# Altium PCB CareLite 1.21.pcbdoc (part 3 of 3)
Units mil, origin at the board's own origin, x right, y up, seen from the top; angles counter-clockwise.
Board outline 3463.4 x 4229.5 mil, 2 copper layers (Top Layer, Bottom Layer); 41 components, 60 nets, 161 pads, 146 vias.
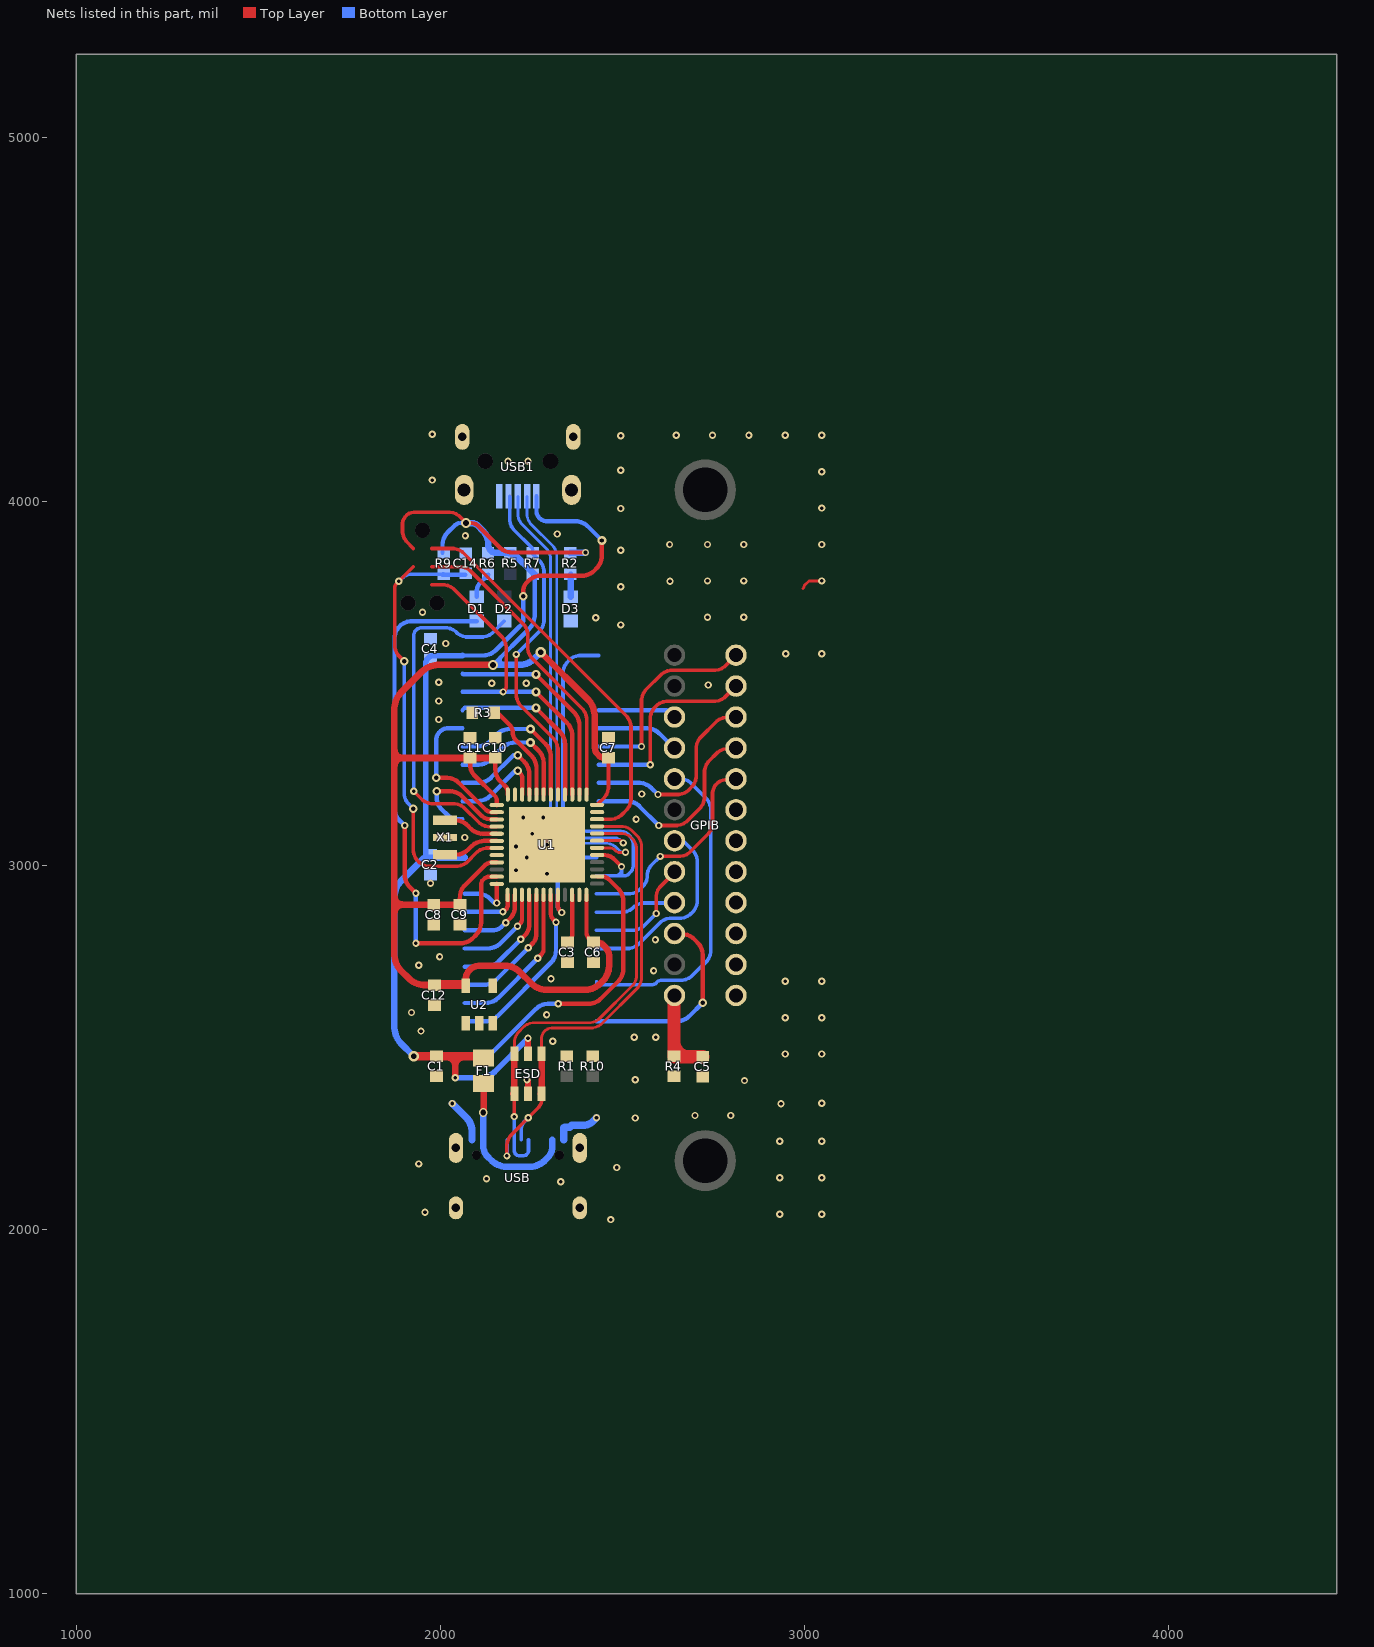
[diagram p3: the nets of this part, all layers, seen from the top]

## Via types
v1: diameter 20, hole 10, Top Layer to Bottom Layer, tented both sides, 127 vias
v2: diameter 24, hole 12, Top Layer to Bottom Layer, tented both sides, 14 vias
v3: diameter 28, hole 16, Top Layer to Bottom Layer, tented both sides, 4 vias
v4: diameter 24, hole 16, Top Layer to Bottom Layer, tented both sides, 1 vias

## Nets (pads, with @x,y where several pads share a name; then routed paths per layer and width w, separated by ;. In a path a pad name is that pad's centre, name@x,y a point inside that pad or via, vN(x,y) a via of type N, cw(c..) or ccw(c..) an arc to the next point about the centre after c; other vN are vias at no path point) (continued)
DIO3: GPIB.3 | length 242.8
  Bottom Layer w12: 2435.02,3427.75 2622.52,3427.75 GPIB.3@2643.52,3406.75 ; 2609.04,3427.75 cw(c2609.03,3395.19) GPIB.3@2632.06,3418.21
DIO4: GPIB.4 | length 229.5
  Bottom Layer w12: 2435.02,3377.75 2568.87,3377.75 2573.86,3377.26 2578.79,3376.28 2583.59,3374.82 2588.23,3372.9 2592.66,3370.53 2596.83,3367.74 2600.71,3364.56 GPIB.4@2643.52,3321.75
DIO5: GPIB.13 | length 560.2
  Top Layer w10: v1(2553.02,3327.75) 2553.02,3457.09 2554.81,3466.06 2558.31,3474.51 2563.39,3482.12 2607.65,3526.38 2615.26,3531.46 2623.71,3534.97 2632.68,3536.75 2755.86,3536.75 2764.83,3538.53 2773.28,3542.04 2780.89,3547.12 GPIB.13@2812.52,3578.75
  Bottom Layer w12: 2435.02,3327.75 v1(2553.02,3327.75)
DIO6: GPIB.14 | length 546.3
  Top Layer w10: v1(2577.02,3277.75) 2577.02,3408.09 2578.8,3417.06 2582.31,3425.51 2587.39,3433.12 2595.65,3441.38 2603.26,3446.46 2611.71,3449.97 2620.68,3451.75 2755.86,3451.75 2764.83,3453.53 2773.28,3457.04 2780.89,3462.12 GPIB.14@2812.52,3493.75
  Bottom Layer w12: 2435.02,3277.75 v1(2577.02,3277.75)
DIO7: GPIB.15 | length 534.9
  Top Layer w10: v1(2598.02,3195.75) 2655.36,3195.75 2664.33,3197.54 2672.78,3201.04 2680.39,3206.12 2692.65,3218.38 2697.74,3225.99 2701.24,3234.44 2703.02,3243.42 2703.02,3326.09 2704.81,3335.06 2708.31,3343.51 2713.39,3351.12 2759.65,3397.38 2767.26,3402.47 2775.71,3405.97 2784.69,3407.75 2811.52,3407.75 GPIB.15@2812.52,3406.75
  Bottom Layer w12: 2435.02,3227.75 2547.37,3227.75 2552.36,3227.26 2557.29,3226.28 2562.09,3224.82 2566.73,3222.9 2571.16,3220.53 2575.33,3217.74 2579.21,3214.56 v1(2598.02,3195.75)
DIO8: GPIB.16 | length 544.5
  Top Layer w10: v1(2600.02,3110.75) 2651.36,3110.75 2660.33,3112.54 2668.78,3116.04 2676.39,3121.12 2715.65,3160.38 2720.73,3167.99 2724.23,3176.44 2726.02,3185.41 2726.02,3261.09 2727.8,3270.06 2731.3,3278.51 2736.39,3286.12 2761.65,3311.38 2769.26,3316.46 2777.71,3319.97 2786.68,3321.75 GPIB.16@2812.52,3321.75
  Bottom Layer w12: 2435.02,3177.75 2514.37,3177.75 2519.36,3177.26 2524.29,3176.28 2529.09,3174.82 2533.73,3172.9 2538.16,3170.53 2542.33,3167.74 2546.21,3164.56 v1(2600.02,3110.75)
DS18B20: R7.2 U1.41 USB1.4 | length 950.2
  Top Layer w10: v1(2209.02,3580.75) 2209.02,3466.41 2210.8,3457.44 2214.31,3448.99 2219.39,3441.38 2312.85,3347.92 2317.93,3340.31 2321.43,3331.86 2323.22,3322.89 U1.41@2323.22,3195.55
  Bottom Layer w10: USB1.4@2190.42,4015.05 2190.42,3949.81 2192.2,3940.84 2195.71,3932.39 2200.79,3924.78 2251.98,3873.59 R7.2@2254.02,3868.66 ; v1(2209.02,3580.75) 2274.65,3646.38 2279.73,3653.99 2283.24,3662.44 2285.02,3671.41 2285.02,3811.09 2283.24,3820.06 2279.73,3828.51 2274.65,3836.12 2254.02,3856.75 R7.2@2254.02,3860.41 R7.2@2254.02,3868.66 ; R7.2@2262.45,3848.33 cw(c2282.79,3868.67) R7.2@2254.02,3868.67
EOI: GPIB.5 | length 898.9
  Bottom Layer w8: 2429.12,2672.75 2429.12,2682.75 ; GPIB.5@2643.52,3236.75 GPIB.5@2644.52,3237.75
  Bottom Layer w10: 2429.12,2672.75 2583.24,2672.75 2591.4,2676.13 2597.64,2682.37 2605.8,2685.75 2665.36,2685.75 2674.33,2687.53 2682.78,2691.04 2690.39,2696.12 2732.65,2738.38 2737.73,2745.99 2741.24,2754.44 2743.02,2763.41 2743.02,3158.09 2741.24,3167.06 2737.73,3175.51 2732.65,3183.12 2687.05,3228.72 2680.43,3233.15 2673.07,3236.2 2665.25,3237.75 2644.52,3237.75 GPIB.5@2643.52,3238.75
F1_1: F1.1 | length 439.1
  Top Layer w18: v4(2118.02,2321.75) 2119.02,2322.75 F1.1@2119.02,2401.75
  Bottom Layer w18: v4(2118.02,2321.75) 2118.52,2321.25 2118.52,2247.35 2118.52,2225.63 2120.15,2217.44 2123.34,2209.73 2127.98,2202.79 2141.23,2189.54 2146.17,2185.48 2151.48,2181.93 2157.12,2178.92 2163.02,2176.48 2169.14,2174.62 2175.4,2173.38 2181.76,2172.75 2246.65,2172.75 2252.91,2173.37 2259.08,2174.59 2265.1,2176.42 2270.91,2178.83 2276.45,2181.79 2281.68,2185.29 2286.55,2189.28 2297.52,2200.25 2302.42,2207.59 2305.8,2215.74 2307.52,2224.39 2307.52,2247.35
GND: C1.1 C2.2 C3.1 C4.2 C5.1 C6.1 C7.1 C8.1 C9.1 C10.1 C11.1 C12.1 C14.1 D3.2 ESD.2 GPIB.18 GPIB.19 GPIB.20 GPIB.21 GPIB.22 GPIB.23 GPIB.24 R1.2 R3.2 R4.2 R10.2 U1.8 U1.23 U1.35 U1.47 U1.49 U2.2 U2.4 USB1.5 USB1.6 USB1.7 USB1.8 USB1.9 USB.A1B12 X1.2 | length 353.2
  Top Layer w8: 2997.02,3761.75 2999.02,3766.75 3001.02,3770.75 3013.02,3782.75 v1(3048.02,3782.75)
  Top Layer w16: v1(2238.02,2411.75) 2241.02,2408.75 ESD.2@2241.02,2373.63
  Bottom Layer w20: v1(2033.02,2346.75) 2072.87,2306.9 2076.29,2302.74 2079.28,2298.26 2081.82,2293.51 2083.88,2288.53 2085.44,2283.38 2086.49,2278.1 2087.02,2272.74 2087.02,2247.35 ; 2339.02,2247.35 2339.02,2279.75 2341.02,2281.75 2356.02,2281.75 2361.02,2286.75 2396.7,2286.75 2403.63,2288.13 2410.15,2290.83 2416.02,2294.75 v1(2429.02,2307.75)
  other v1: 2468.02,2027.75 2933.02,2042.75 3048.02,2042.75 1958.02,2047.75 2331.02,2131.75 2127.02,2139.75 2933.02,2142.75 3048.02,2142.75 2485.02,2170.75 1941.02,2180.75 2933.02,2242.75 3048.02,2242.75 2536.02,2306.75 2700.02,2313.75 2798.02,2313.75 2936.02,2345.75 3048.02,2347.75 2836.02,2409.75 2536.02,2411.75 2948.02,2482.75 3048.02,2482.75 2309.02,2517.75 2533.02,2528.75 2592.02,2528.75 1947.02,2545.75 2948.02,2582.75 3048.02,2582.75 2292.02,2590.75 1921.02,2596.75 2948.02,2682.75 3048.02,2682.75 2304.02,2689.75 2586.02,2711.75 1941.02,2726.75 1998.02,2749.75 2591.02,2796.75 1973.02,2951.75 2293.02,2977.75 2208.02,2987.75 2238.02,3022.75 2208.02,3052.75 2293.03,3057.75 2067.02,3077.75 2253.02,3087.75 2538.02,3127.75 2228.02,3132.75 2228.02,3132.75 2283.02,3132.75 2553.54,3197.07 1996.02,3401.75 1996.05,3452.76 2736.02,3496.75 2141.02,3501.75 2236.02,3501.75 1996.05,3503.87 2949.02,3582.75 3048.02,3582.75 2015.02,3610.75 2496.02,3661.75 2427.02,3681.75 2734.02,3682.75 2834.02,3682.75 1951.02,3696.75 2496.02,3766.75 2631.02,3781.75 2734.02,3782.75 2834.02,3782.75 2496.02,3866.75 2630.02,3882.75 2734.02,3882.75 2834.02,3882.75 3048.02,3882.75 2069.02,3906.75 2321.02,3911.75 2496.02,3981.75 3048.02,3982.75 1978.02,4059.75 3048.02,4082.75 2496.02,4086.75 2186.02,4111.75 2241.02,4111.75 2496.02,4181.75 2648.02,4182.75 2748.02,4182.75 2848.02,4182.75 2948.02,4182.75 3048.02,4182.75 1978.02,4185.75
GPIB_12: C5.2 GPIB.12 R4.1 | length 311.8
  Top Layer w36: 2642.02,2516.35 ccw(c2683.02,2516.35) 2683.02,2475.35 ; GPIB.12@2643.52,2643.75 2642.02,2642.25 2642.02,2476.35 2643.02,2475.35 C5.2@2721.02,2475.35
IFC: GPIB.9 | length 221.7
  Bottom Layer w10: 2429.12,2872.75 2504.55,2872.75 2512.79,2874.39 2520.56,2877.61 2527.55,2882.28 2533.49,2888.22 2540.48,2892.89 2548.25,2896.11 2556.49,2897.75 2642.52,2897.75 GPIB.9@2643.52,2896.75
IO_ATN: U1.18 | length 429.4
  Top Layer w12: v1(2268.02,2745.75) 2277.61,2755.34 2280.51,2759.68 2282.5,2764.49 2283.52,2769.6 U1.18@2283.53,2919.96
  Bottom Layer w12: 2066.92,2622.75 2126.37,2622.75 2131.36,2623.24 2136.29,2624.22 2141.09,2625.68 2145.73,2627.6 2150.16,2629.97 2154.33,2632.76 2158.21,2635.94 v1(2268.02,2745.75)
IO_DAV: U1.16 | length 313.2
  Top Layer w12: v1(2221.02,2797.75) 2235.32,2812.05 2239.63,2818.51 2242.61,2825.68 2244.12,2833.3 U1.16@2244.12,2919.96
  Bottom Layer w12: 2066.92,2722.75 2127.37,2722.75 2132.36,2723.24 2137.29,2724.22 2142.09,2725.68 2146.73,2727.6 2151.16,2729.97 2155.33,2732.76 2159.21,2735.94 v1(2221.02,2797.75)
IO_DC: U1.26 | length 834.8
  Top Layer w12: v1(2324.02,2620.75) 2408.37,2620.75 2413.36,2621.24 2418.29,2622.22 2423.09,2623.68 2427.73,2625.6 2432.16,2627.97 2436.33,2630.76 2440.21,2633.94 2489.83,2683.56 2493.01,2687.44 2495.8,2691.61 2498.17,2696.04 2500.09,2700.68 2501.55,2705.48 2502.53,2710.41 2503.02,2715.4 2503.02,2904.1 2502.53,2909.09 2501.55,2914.02 2500.09,2918.82 2498.17,2923.46 2495.8,2927.89 2493.01,2932.06 2489.83,2935.94 2461.92,2963.85 2457.08,2967.08 2451.7,2969.31 2445.98,2970.45 U1.26@2430.82,2970.45
  Bottom Layer w12: 2066.92,2472.75 2110.37,2472.75 2115.36,2473.24 2120.29,2474.22 2125.09,2475.68 2129.73,2477.6 2134.16,2479.97 2138.33,2482.76 2142.21,2485.94 2263.83,2607.56 2267.71,2610.74 2271.89,2613.53 2276.31,2615.9 2280.95,2617.82 2285.75,2619.28 2290.68,2620.26 2295.67,2620.75 v1(2324.02,2620.75)
IO_DIO1: U1.38 | length 580.3
  Top Layer w12: v2(2263.02,3525.75) 2369.13,3419.64 2372.32,3415.76 2375.1,3411.59 2377.47,3407.16 2379.39,3402.52 2380.85,3397.72 2381.83,3392.79 2382.32,3387.8 U1.38@2382.32,3195.55
  Bottom Layer w12: 2061.02,3527.75 2063.02,3525.75 v2(2263.02,3525.75)
IO_DIO2: U1.39 | length 930.7
  Top Layer w10: 1976.02,3771.75 2011.36,3771.75 2020.33,3769.97 2028.78,3766.46 2036.39,3761.38 2170.65,3627.12 2175.73,3619.51 2179.24,3611.06 2181.02,3602.09 2181.02,3489.96 2178.82,3484.42 v1(2172.51,3477.75)
  Top Layer w12: v2(2263.02,3477.75) 2349.43,3391.34 2352.61,3387.46 2355.4,3383.28 2357.77,3378.86 2359.69,3374.22 2361.15,3369.42 2362.13,3364.49 2362.62,3359.5 U1.39@2362.62,3195.55
  Bottom Layer w12: 2061.02,3477.75 v1(2172.51,3477.75) v2(2263.02,3477.75)
IO_DIO3: U1.40 | length 473.6
  Top Layer w12: v2(2263.02,3433.75) 2329.73,3367.04 2332.91,3363.16 2335.7,3358.99 2338.07,3354.56 2339.99,3349.92 2341.45,3345.12 2342.43,3340.19 2342.92,3335.2 U1.40@2342.93,3195.55
  Bottom Layer w12: 2061.02,3427.75 2067.02,3433.75 v2(2263.02,3433.75)
IO_DIO4: U1.2 | length 396.4
  Top Layer w12: v2(1989.02,3241.75) 2018.37,3241.75 2023.36,3241.26 2028.29,3240.28 2033.09,3238.82 2037.73,3236.9 2042.15,3234.53 2046.33,3231.74 2050.21,3228.56 2125.39,3153.38 2130.03,3150.28 2135.2,3148.14 2140.68,3147.05 U1.2@2155.22,3147.05
  Bottom Layer w12: v2(1989.02,3241.75) 1989.02,3348.51 1990.27,3354.78 1992.71,3360.68 1996.26,3365.99 2000.78,3370.51 2006.09,3374.06 2011.99,3376.5 2018.26,3377.75 2061.02,3377.75
IO_DIO5: U1.42 | length 403.6
  Top Layer w12: v2(2248.02,3375.75) 2290.33,3333.44 2293.51,3329.56 2296.3,3325.39 2298.67,3320.96 2300.59,3316.32 2302.05,3311.52 2303.03,3306.59 2303.52,3301.6 U1.42@2303.53,3195.55
  Bottom Layer w12: 2061.02,3327.75 2103.37,3327.75 2108.36,3328.24 2113.29,3329.22 2118.09,3330.68 2122.73,3332.6 2127.16,3334.97 2131.33,3337.76 2135.21,3340.94 2156.83,3362.56 2160.71,3365.74 2164.89,3368.53 2169.31,3370.9 2173.95,3372.82 2178.75,3374.28 2183.68,3375.26 2188.67,3375.75 v2(2248.02,3375.75)
IO_DIO6: U1.43 | length 363.8
  Top Layer w12: v2(2248.02,3338.75) 2270.73,3316.04 2273.91,3312.16 2276.7,3307.99 2279.07,3303.56 2280.99,3298.92 2282.45,3294.12 2283.43,3289.19 2283.92,3284.2 U1.43@2283.93,3195.55
  Bottom Layer w12: 2061.02,3277.75 2105.37,3277.75 2110.36,3278.24 2115.29,3279.22 2120.09,3280.68 2124.73,3282.6 2129.16,3284.97 2133.33,3287.76 2137.21,3290.94 2171.83,3325.56 2175.71,3328.74 2179.89,3331.53 2184.31,3333.9 2188.95,3335.82 2193.75,3337.28 2198.68,3338.26 2203.67,3338.75 v2(2248.02,3338.75)
IO_DIO7: U1.45 | length 300.4
  Top Layer w12: v2(2213.02,3303.75) 2231.33,3285.44 2234.51,3281.56 2237.3,3277.39 2239.67,3272.96 2241.59,3268.32 2243.05,3263.52 2244.03,3258.59 2244.52,3253.6 U1.45@2244.53,3195.55
  Bottom Layer w12: 2061.02,3227.75 2106.37,3227.75 2111.36,3228.24 2116.29,3229.22 2121.09,3230.68 2125.73,3232.6 2130.16,3234.97 2134.33,3237.76 2138.21,3240.94 2201.02,3303.75 v2(2213.02,3303.75)
IO_DIO8: U1.46 | length 253.6
  Top Layer w12: v2(2213.02,3260.75) 2221.75,3252.02 2224.82,3244.61 U1.46@2224.82,3195.55
  Bottom Layer w12: 2061.02,3177.75 2104.37,3177.75 2109.36,3178.24 2114.29,3179.22 2119.09,3180.68 2123.73,3182.6 2128.16,3184.97 2132.33,3187.76 2136.21,3190.94 2206.02,3260.75 v2(2213.02,3260.75)
IO_EOI: U1.17 | length 367.9
  Top Layer w12: v1(2242.02,2774.75) 2255.51,2788.24 2259.59,2794.34 2262.39,2801.11 2263.82,2808.3 U1.17@2263.82,2919.96
  Bottom Layer w12: 2066.92,2672.75 2121.37,2672.75 2126.36,2673.24 2131.29,2674.22 2136.09,2675.68 2140.73,2677.6 2145.16,2679.97 2149.33,2682.76 2153.21,2685.94 v1(2242.02,2774.75)
IO_IFC: U1.13 | length 157.7
  Top Layer w12: v1(2172.02,2873.75) 2174.02,2873.75 2182.16,2881.89 2185.02,2888.79 U1.13@2185.03,2919.96
  Bottom Layer w12: 2066.92,2872.75 2067.92,2873.75 v1(2172.02,2873.75)
IO_NDAC: U1.14 | length 205.1
  Top Layer w12: v1(2180.02,2843.75) 2195.31,2859.04 2199.92,2865.94 2203.1,2873.62 2204.72,2881.76 U1.14@2204.72,2919.96
  Bottom Layer w12: 2066.92,2822.75 2147.7,2822.75 2154.63,2824.13 2161.15,2826.83 2167.02,2830.75 v1(2180.02,2843.75)
IO_NRFD: U1.15 | length 258.8
  Top Layer w12: v1(2212.02,2833.75) 2221.2,2842.93 2224.42,2850.71 U1.15@2224.43,2919.96
  Bottom Layer w12: 2066.92,2772.75 2132.37,2772.75 2137.36,2773.24 2142.29,2774.22 2147.09,2775.68 2151.73,2777.6 2156.16,2779.97 2160.33,2782.76 2164.21,2785.94 v1(2212.02,2833.75)
IO_PE: U1.3 | length 314.3
  Top Layer w12: v2(1990.02,3204.75) 2027.37,3204.75 2032.36,3204.26 2037.29,3203.28 2042.09,3201.82 2046.73,3199.9 2051.16,3197.53 2055.33,3194.74 2059.21,3191.56 2114.85,3135.92 2121.14,3131.72 2128.12,3128.82 2135.54,3127.35 U1.3@2155.23,3127.36
  Bottom Layer w12: v2(1990.02,3204.75) 1990.02,3182.47 1991.69,3174.07 1994.97,3166.17 1999.72,3159.05 2022.93,3135.84 2028.87,3131.87 2035.46,3129.14 2042.45,3127.75 2061.02,3127.75
IO_REN: U1.12 | length 149.1
  Top Layer w12: v1(2155.02,2897.75) U1.12@2155.23,2950.16
  Bottom Layer w12: 2066.92,2922.75 2109.55,2922.75 2117.79,2921.11 2125.56,2917.89 2132.55,2913.22 2148.02,2897.75 v1(2155.02,2897.75)
IO_SC: U1.20 | length 283.7
  Top Layer w12: U1.20@2322.82,2919.96 2322.82,2887.07 2325.73,2880.04 v1(2334.02,2871.75)
  Bottom Layer w12: v1(2334.02,2871.75) 2325.88,2879.89 2323.02,2886.79 2323.02,2961.1 2323.51,2966.09 2324.49,2971.02 2325.95,2975.82 2327.87,2980.46 2330.24,2984.89 2333.03,2989.06 2336.21,2992.94 2352.83,3009.56 2356.71,3012.74 2360.89,3015.53 2365.31,3017.9 2369.95,3019.82 2374.75,3021.28 2379.68,3022.26 2384.67,3022.75 2429.12,3022.75
IO_SRQ: U1.19 | length 496.6
  Top Layer w12: U1.19@2303.12,2919.96 2303.12,2867.68 2304.1,2862.77 2306.01,2858.14 2308.8,2853.97 v1(2318.02,2844.75)
  Bottom Layer w12: 2066.92,2572.75 2124.37,2572.75 2129.36,2573.24 2134.29,2574.22 2139.09,2575.68 2143.73,2577.6 2148.16,2579.97 2152.33,2582.76 2156.21,2585.94 2304.83,2734.56 2308.01,2738.44 2310.8,2742.61 2313.17,2747.04 2315.09,2751.68 2316.55,2756.48 2317.53,2761.41 2318.02,2766.4 v1(2318.02,2844.75)
IO_TE: U1.29 | length 1042.6
  Top Layer w12: U1.29@2430.82,3029.56 2452.73,3029.55 2460.98,3027.91 2468.76,3024.69 2475.76,3020.01 v1(2498.02,2997.75)
  Bottom Layer w10: 2429.12,2972.75 2498.02,2972.75 ; 2435.02,3577.75 2381.68,3577.75 2372.71,3575.97 2364.26,3572.46 2356.65,3567.38 2347.39,3558.12 2342.31,3550.51 2338.8,3542.06 2337.02,3533.09 2337.02,3158.41 2338.8,3149.44 2342.31,3140.99 2347.39,3133.38 2375.65,3105.12 2383.26,3100.04 2391.71,3096.53 2400.68,3094.75 2496.16,3094.75 2503.42,3093.31 2510.25,3090.48 2516.4,3086.37 2521.64,3081.13 2525.75,3074.98 2528.58,3068.15 2530.02,3060.89 2530.02,2998.91 2528.91,2993.31 2526.72,2988.02 2523.54,2983.27 2515.78,2975.51 2509.12,2972.75 2498.02,2972.75 ; 2483.02,2972.75 ccw(c2483.02,2987.75) 2498.02,2987.75 ; v1(2498.02,2997.75) 2498.02,2972.75
LED1: D1.2 U1.11 | length 1480.7
  Top Layer w12: v1(1902.02,3110.75) 1902.02,2974.4 1902.51,2969.41 1903.49,2964.49 1904.95,2959.68 1906.87,2955.04 1909.24,2950.62 1912.03,2946.44 1915.21,2942.56 v1(1933.02,2924.75) ; v1(1933.02,2786.75) 2056.37,2786.75 2061.36,2787.24 2066.29,2788.22 2071.09,2789.68 2075.73,2791.6 2080.16,2793.97 2084.33,2796.76 2088.21,2799.94 2098.83,2810.56 2102.01,2814.44 2104.8,2818.61 2107.17,2823.04 2109.09,2827.68 2110.55,2832.48 2111.53,2837.41 2112.02,2842.4 2112.02,2950.57 2115.68,2959.41 2122.46,2966.19 2131.3,2969.85 U1.11@2155.22,2969.85
  Bottom Layer w12: v1(1902.02,3110.75) 1884.69,3128.08 1879.46,3135.91 1875.86,3144.61 1874.02,3153.84 1874.02,3628.39 1875.89,3637.79 1879.56,3646.64 1884.88,3654.61 1891.66,3661.39 1899.63,3666.71 1908.48,3670.38 1917.88,3672.25 D1.2@2100.02,3672.25 ; v1(1933.02,2786.75) v1(1933.02,2924.75)
LED2: D2.2 U1.4 | length 974.8
  Top Layer w10: v1(1927.02,3204.75) 1950.65,3181.12 1958.26,3176.04 1966.71,3172.53 1975.68,3170.75 2039.36,3170.75 2048.33,3168.97 2056.78,3165.46 2064.39,3160.38 2106.85,3117.92 2114.39,3112.88 2122.76,3109.42 2131.64,3107.65 U1.4@2155.22,3107.65
  Bottom Layer w10: v1(1927.02,3204.75) 1927.02,3635.97 1930.4,3644.13 1936.64,3650.37 1944.8,3653.75 2018.55,3653.75 2026.79,3652.11 2034.56,3648.89 2041.55,3644.22 2047.49,3638.28 2054.48,3633.61 2062.25,3630.39 2070.49,3628.75 2117.86,3628.75 2126.83,3630.53 2135.28,3634.04 2142.89,3639.12 D2.2@2176.02,3672.25
NDAC: GPIB.8 | length 313.1
  Top Layer w10: v1(2593.02,2868.75) 2593.02,2916.59 2594.81,2925.56 2598.31,2934.01 2603.39,2941.62 GPIB.8@2643.52,2981.75
  Bottom Layer w10: 2429.12,2822.75 2532.36,2822.75 2541.33,2824.53 2549.78,2828.04 2557.39,2833.12 v1(2593.02,2868.75)
NRFD: GPIB.7 | length 559
  Bottom Layer w10: 2429.12,2772.75 2518.36,2772.75 2527.33,2774.53 2535.78,2778.04 2543.39,2783.12 2605.65,2845.38 2613.26,2850.46 2621.71,2853.97 2630.68,2855.75 2661.36,2855.75 2670.33,2857.53 2678.78,2861.04 2686.39,2866.12 2695.65,2875.38 2700.73,2882.99 2704.24,2891.44 2706.02,2900.41 2706.02,3015.09 2704.24,3024.06 2700.73,3032.51 2695.65,3040.12 2669.02,3066.75 GPIB.7@2643.52,3066.75 ; GPIB.7@2656.95,3066.75 cw(c2656.95,3037.61) 2677.56,3058.21
NRST: C14.2 R9.1 U1.7 | length 1279.8
  Top Layer w10: v2(1901.02,3561.75) 1884.93,3577.84 1880.07,3585.11 1876.73,3593.19 1875.02,3601.76 1875.02,3766.76 1877.84,3773.57 v1(1885.88,3781.61) 1926.02,3821.75 ; v2(1926.02,3156.75) 1926.02,3040.3 1927.79,3031.4 1931.27,3023.01 1936.31,3015.46 1942.73,3009.04 1950.28,3004 1958.67,3000.52 1967.57,2998.75 2047.36,2998.75 2056.33,3000.53 2064.78,3004.04 2072.39,3009.12 2101.55,3038.28 2109.16,3043.36 2117.61,3046.86 2126.58,3048.65 U1.7@2155.22,3048.65
  Bottom Layer w10: v1(1885.88,3781.61) 1898.74,3793.73 1904.47,3797.37 1910.78,3799.88 1917.44,3801.15 R9.1@2005.02,3801.15 ; v2(1901.02,3561.75) 1901.02,3195.22 1902.66,3186.98 1905.88,3179.21 1910.55,3172.22 v2(1926.02,3156.75)
  Bottom Layer w12: R9.1@2009.02,3801.1 2007.36,3801.09 2006.02,3799.75 C14.2@2069.02,3799.75
OSC_IN: U1.5 X1.3 | length 153.2
  Top Layer w12: X1.3@2013.02,3124.99 2042.17,3124.95 2047.16,3124.46 2052.09,3123.48 2056.89,3122.02 2061.53,3120.1 2065.95,3117.73 2070.13,3114.95 2074.01,3111.76 2084.63,3101.14 2088.51,3097.95 2092.68,3095.17 2097.11,3092.8 2101.75,3090.88 2106.55,3089.42 2111.48,3088.44 2116.47,3087.95 U1.5@2155.23,3087.96
OSC_OUT: U1.6 X1.1 | length 153.5
  Top Layer w12: X1.1@2013.02,3030.55 2044.17,3030.55 2049.16,3031.04 2054.09,3032.02 2058.89,3033.48 2063.53,3035.4 2067.95,3037.77 2072.13,3040.55 2076.01,3043.74 2087.33,3055.06 2091.21,3058.24 2095.39,3061.03 2099.81,3063.4 2104.45,3065.32 2109.25,3066.78 2114.18,3067.76 2119.17,3068.25 U1.6@2155.22,3068.25
R2_2: D3.1 R2.2 | length 60
  Bottom Layer w18: D3.1@2358.02,3739.21 R2.2@2358.02,3799.25
R6_2: D1.1 R6.2 | length 72.4
  Bottom Layer w12: D1.1@2100.02,3739.21 2100.02,3756.89 2101.34,3763.53 2103.93,3769.8 2107.7,3775.43 R6.2@2132.02,3799.75
REN: GPIB.17 | length 588.5
  Top Layer w10: v1(2604.02,3025.75) 2659.36,3025.75 2668.33,3027.54 2676.78,3031.04 2684.39,3036.12 2737.65,3089.38 2742.74,3096.99 2746.24,3105.44 2748.02,3114.41 2748.02,3201.36 2749.53,3208.94 2752.49,3216.09 2756.79,3222.52 2762.25,3227.99 2768.68,3232.28 2775.83,3235.24 2783.41,3236.75 GPIB.17@2812.52,3236.75
  Bottom Layer w10: 2429.12,2922.75 2521.36,2922.75 2530.33,2924.53 2538.78,2928.04 2546.39,2933.12 2559.59,2946.32 2564.21,2953.24 2567.4,2960.93 2569.02,2969.09 2569.02,2977.41 2570.64,2985.57 2573.83,2993.26 2578.45,3000.18 v1(2604.02,3025.75)
SRQ: GPIB.10 | length 551.5
  Top Layer w12: GPIB.10@2643.52,2813.75 2645.52,2811.75 2669.35,2811.75 2678.33,2809.96 2686.78,2806.46 2694.4,2801.38 2707.83,2787.94 2711.01,2784.06 2713.8,2779.89 2716.17,2775.46 2718.09,2770.82 2719.55,2766.02 2720.53,2761.09 2721.02,2756.1 v2(2721.02,2623.75)
  Bottom Layer w12: 2429.12,2572.75 2651.37,2572.75 2656.36,2573.24 2661.29,2574.22 2666.09,2575.68 2670.73,2577.6 2675.16,2579.97 2679.33,2582.76 2683.21,2585.94 v2(2721.02,2623.75)
SWCLK: U1.37 | length 850.6
  Top Layer w10: 1976.02,3821.75 2056.36,3821.75 2065.33,3819.97 2073.78,3816.46 2081.39,3811.38 2229.65,3663.12 2234.73,3655.51 2238.24,3647.06 2240.02,3638.09 2240.02,3596.41 2241.8,3587.44 2245.31,3578.99 2250.39,3571.38 2391.65,3430.12 2396.73,3422.51 2400.24,3414.06 2402.02,3405.09 U1.37@2402.02,3195.75
SWDIO: U1.34 | length 1078.3
  Top Layer w10: 1976.02,3871.75 2036.36,3871.75 2045.33,3869.97 2053.78,3866.46 2061.39,3861.38 2513.65,3409.12 2518.73,3401.51 2522.24,3393.06 2524.02,3384.09 2524.02,3180.41 2522.24,3171.44 2518.73,3162.99 2513.65,3155.38 2496.59,3138.32 2488.98,3133.24 2480.53,3129.74 2471.56,3127.95 U1.34@2430.82,3127.96
U1_22: C3.2 U1.22 | length 135.3
  Top Layer w12: C3.2@2349.02,2789.35 2358.79,2799.12 2362.22,2807.4 U1.22@2362.22,2919.96
U1_44: R3.1 U1.44 | length 274.3
  Top Layer w12: R3.1@2147.68,3420.75 2157.02,3420.75 2192.28,3385.49 2195.59,3380.54 2197.86,3375.05 2199.02,3369.22 2199.02,3363.28 2200.18,3357.45 2202.45,3351.96 2205.76,3347.01 2251.03,3301.74 2254.22,3297.86 2257,3293.68 2259.37,3289.26 2261.29,3284.62 2262.75,3279.82 2263.73,3274.89 2264.22,3269.9 U1.44@2264.22,3195.55
UART1_RX: U1.31 USB1.2 | length 1193.5
  Top Layer w8: U1.31@2430.82,3068.85 2496.92,3068.85 v1(2503.02,3062.75)
  Bottom Layer w8: USB1.2@2238.62,4015.05 2238.62,3962.35 2240.23,3954.27 2243.38,3946.66 2247.95,3939.82 2310.69,3877.08 2315.26,3870.24 2318.41,3862.63 2320.02,3854.55 2320.02,3148.95 2321.63,3140.87 2324.78,3133.26 2329.35,3126.42 2370.69,3085.08 2377.53,3080.51 2385.14,3077.36 2393.22,3075.75 2485.24,3075.75 2493.4,3072.37 v1(2503.02,3062.75)
UART1_TX: U1.30 USB1.3 | length 1239.6
  Top Layer w8: U1.30@2430.82,3049.25 2468.93,3049.25 2476.77,3046 2482.77,3040 2490.61,3036.75 v1(2509.02,3036.75)
  Bottom Layer w8: USB1.3@2213.02,4015.05 2213.02,3962.95 2214.63,3954.87 2217.78,3947.26 2222.35,3940.42 2293.69,3869.08 2298.26,3862.24 2301.41,3854.63 2303.02,3846.55 2303.02,3143.95 2304.63,3135.87 2307.78,3128.26 2312.35,3121.42 2362.69,3071.08 2369.53,3066.51 2377.14,3063.36 2385.22,3061.75 2458.82,3061.75 2466.9,3060.14 2474.51,3056.99 2481.35,3052.42 2494.82,3038.95 2500.14,3036.75 v1(2509.02,3036.75)
USB+: ESD.3 ESD.4 U1.33 | length 1332.6
  Top Layer w8: ESD.4@2278.42,2488.85 2278.42,2527.66 2279.57,2533.47 2281.84,2538.94 2285.13,2543.86 2289.31,2548.04 2294.23,2551.33 2299.7,2553.59 2305.51,2554.75 2418.82,2554.75 2426.9,2556.36 2434.51,2559.51 2441.35,2564.08 2543.69,2666.42 2548.26,2673.26 2551.41,2680.87 2553.02,2688.95 2553.02,3056.55 2551.41,3064.63 2548.26,3072.24 2543.69,3079.08 2523.85,3098.92 2517.01,3103.49 2509.4,3106.64 2501.32,3108.25 U1.33@2430.82,3108.25
  Top Layer w10: v1(2183.02,2202.75) 2183.02,2234.09 2184.81,2243.06 2188.31,2251.51 2193.39,2259.12 v1(2242.02,2307.75) 2270.47,2336.2 2274.37,2342.03 2277.05,2348.51 2278.42,2355.39 ESD.3@2278.42,2373.63
  Top Layer w18: ESD.3@2275.42,2373.95 2278.42,2376.95 ESD.4@2278.42,2483.85
  Bottom Layer w10: v1@2183.52,2203.25 2183.52,2247.35 ; 2222.82,2247.35 2222.82,2278.2 2224.08,2284.53 2226.55,2290.5 2230.14,2295.87 v1(2242.02,2307.75)
USB-: ESD.1 ESD.6 U1.32 | length 1282.6
  Top Layer w8: ESD.6@2203.62,2488.85 2203.62,2518.15 2205.23,2526.23 2208.38,2533.84 2212.95,2540.68 2231.69,2559.42 2238.53,2563.99 2246.14,2567.14 2254.22,2568.75 2412.82,2568.75 2420.9,2570.36 2428.51,2573.51 2435.35,2578.08 2529.69,2672.42 2534.26,2679.26 2537.41,2686.87 2539.02,2694.95 2539.02,3049.55 2537.41,3057.63 2534.26,3065.24 2529.69,3072.08 2522.55,3079.22 2515.71,3083.79 2508.1,3086.94 2500.02,3088.55 U1.32@2430.82,3088.56
  Top Layer w10: v1@2203.62,2311.35 ESD.1@2203.62,2373.63
  Top Layer w18: ESD.1@2200.62,2373.95 2203.62,2376.95 ESD.6@2203.62,2483.85
  Bottom Layer w10: v1(2203.02,2310.75) 2203.22,2310.55 2203.22,2247.35 2203.22,2214.78 2205.51,2209.26 2209.73,2205.04 2215.25,2202.75 2229.53,2202.75 2235.49,2205.22 2240.05,2209.78 2242.52,2215.74 2242.52,2247.35
VCC: C6.2 C7.2 C8.2 C9.2 C10.2 C11.2 C12.2 R2.1 R5.1 R6.1 R7.1 R9.2 U1.1 U1.9 U1.24 U1.36 U1.48 U2.5 | length 5232.1
  Top Layer w10: 1926.02,3871.75 1906.39,3891.38 1901.31,3898.99 1897.81,3907.44 1896.02,3916.41 1896.02,3940.97 1897.33,3947.57 1899.91,3953.78 1903.64,3959.37 1908.4,3964.13 1913.99,3967.86 1920.2,3970.44 1926.8,3971.75 2026.36,3971.75 2035.33,3969.97 2043.78,3966.46 2051.39,3961.38 v3(2071.02,3941.75) ; v3@2061.48,3951.29 ccw(c2082.09,3971.89) v3@2082.09,3942.75 ; U1.36@2430.82,3167.36 2451.65,3188.18 2456.73,3195.79 2460.24,3204.24 2462.02,3213.21 C7.2@2462.02,3296.2 ; C7.2@2447.66,3292.15 cw(c2447.66,3277.79) 2462.02,3277.79
  Top Layer w12: C9.2@2037.02,2896.35 ccw(c2037.02,2913.35) 2054.02,2913.35 ; C9.2@2054.02,2893.35 2054.02,2917.73 2055.85,2926.92 2059.43,2935.58 2064.64,2943.37 2123.86,3002.59 2128.75,3005.86 2134.17,3008.1 2139.93,3009.25 U1.9@2155.22,3009.25 ; C11.2@2065.02,3293.15 cw(c2065.02,3276.15) 2082.02,3276.15 cw(c2099.02,3276.15) C11.2@2099.02,3293.15 ; v3(2071.02,3941.75) 2086.49,3941.75 2092.32,3940.59 2097.81,3938.32 2102.76,3935.01 2163.83,3873.94 2167.71,3870.76 2171.89,3867.97 2176.31,3865.6 2180.95,3863.68 2185.75,3862.22 2190.68,3861.24 2195.67,3860.75 v1(2399.02,3860.75) ; C11.2@2082.02,3296.2 2082.02,3273.62 2083.71,3265.13 2087.02,3257.14 2091.83,3249.94 2151.58,3190.19 2155.22,3181.4 U1.1@2155.23,3166.76 ; C10.2@2134.02,3293.15 cw(c2134.02,3276.15) 2151.02,3276.15 ; C10.2@2151.02,3296.2 2151.02,3264.4 2151.51,3259.41 2152.49,3254.48 2153.95,3249.68 2155.87,3245.04 2158.24,3240.61 2161.03,3236.44 2164.21,3232.56 2182.52,3214.25 2185.42,3207.24 U1.48@2185.43,3195.55 ; U1.24@2401.62,2919.96 2401.62,2816.13 2402.76,2810.39 2405,2804.98 2408.25,2800.12 C6.2@2419.02,2789.35
  Top Layer w18: 1874.02,2870.35 cw(c1897.02,2870.35) 1897.02,2893.35 cw(c1897.02,2916.35) 1874.02,2916.35 ; 1874.02,3273.15 cw(c1897.02,3273.15) 1897.02,3296.15 cw(c1897.02,3319.15) 1874.02,3319.15 ; C8.2@1982.02,2885.45 C8.2@1982.02,2893.35 ; C12.2@1984.02,2672.35 1954.6,2672.35 1948.39,2672.96 1942.27,2674.18 1936.3,2675.99 1930.54,2678.38 1925.04,2681.32 1919.85,2684.78 1915.03,2688.74 1890.81,2712.96 1886.75,2717.9 1883.2,2723.21 1880.19,2728.85 1877.75,2734.75 1875.89,2740.86 1874.65,2747.13 1874.02,2753.49 1874.02,2893.35 ; C9.2@2054.02,2893.35 C8.2@1982.02,2893.35 ; U2.5@2069.62,2673.85 2069.62,2691.49 2070.94,2698.14 2073.53,2704.4 2077.3,2710.03 2084.1,2716.83 2090.64,2721.2 2097.91,2724.22 2105.63,2725.75 2177.28,2725.75 2183.64,2725.12 2189.91,2723.88 2196.02,2722.02 2201.92,2719.58 2207.56,2716.57 2212.87,2713.02 2217.81,2708.96 2251.23,2675.54 2256.17,2671.48 2261.48,2667.93 2267.12,2664.92 2273.02,2662.48 2279.14,2660.62 2285.4,2659.38 2291.76,2658.75 2398.28,2658.75 2404.64,2659.38 2410.91,2660.62 2417.02,2662.48 2422.92,2664.92 2428.56,2667.93 2433.87,2671.48 2438.81,2675.54 2447.23,2683.96 2451.29,2688.9 2454.84,2694.21 2457.85,2699.85 2460.29,2705.75 2462.15,2711.86 2463.39,2718.13 2464.02,2724.49 2464.02,2753.03 2462.47,2760.81 2459.43,2768.15 2455.03,2774.74 2444.06,2785.71 2435.27,2789.35 C6.2@2420.62,2789.35 ; v3(2145.02,3551.75) 1991.76,3551.75 1985.4,3551.12 1979.13,3549.88 1973.02,3548.02 1967.12,3545.58 1961.48,3542.57 1956.17,3539.02 1951.23,3534.96 1890.81,3474.54 1886.75,3469.6 1883.2,3464.29 1880.19,3458.65 1877.75,3452.75 1875.89,3446.64 1874.65,3440.37 1874.02,3434.01 1874.02,3296.15 ; C10.2@2151.02,3296.2 C11.2@2082.02,3296.2 1874.02,3296.15 ; v3(2276.02,3586.75) 2407.23,3455.54 2411.29,3450.6 2414.84,3445.29 2417.85,3439.65 2420.29,3433.75 2422.15,3427.64 2423.39,3421.37 2424.02,3415.01 2424.02,3324.78 2425.24,3318.64 2427.63,3312.86 2431.11,3307.66 2439.05,3299.72 2447.66,3296.15 C7.2@2462.02,3296.2 ; 1874.02,2893.35 C8.2@1982.02,2893.35 ; 1874.02,2893.35 1874.02,3296.15
  Top Layer w24: C12.2@1984.02,2672.35 1985.62,2673.85 U2.5@2069.62,2673.85
  Bottom Layer w12: R9.2@2006.02,3859.75 2006.02,3883.24 2006.51,3888.2 2007.48,3893.08 2008.93,3897.85 2010.83,3902.45 2013.18,3906.85 2015.95,3910.99 2019.11,3914.84 2040.09,3935.82 2044.44,3938.73 2049.27,3940.73 2054.4,3941.75 v3@2068.02,3941.75 ; v3(2145.02,3551.75) 2245.83,3652.56 2249.01,3656.44 2251.8,3660.61 2254.17,3665.04 2256.09,3669.68 2257.55,3674.48 2258.53,3679.41 2259.02,3684.4 R7.1@2259.02,3800.75 ; 2166.04,3572.77 ccw(c2173.5,3565.31) 2173.5,3554.75
  Bottom Layer w18: v3(2071.02,3941.75) 2086.49,3941.75 2092.32,3940.59 2097.81,3938.32 2102.76,3935.01 2117.68,3920.09 2121.15,3915.87 2124.18,3911.33 2126.75,3906.52 2129.06,3900.95 2130.53,3896.09 2131.52,3891.11 2132.02,3886.05 2132.02,3878.18 2135.52,3869.72 2141.99,3863.25 2150.45,3859.75 2194.52,3859.75 2200.02,3859.75 R7.1@2259.02,3800.75 ; v3(2145.02,3551.75) 2219.21,3551.75 2225.05,3552.32 2230.81,3553.47 2236.43,3555.18 2241.85,3557.42 2247.03,3560.19 2251.91,3563.45 2256.45,3567.17 v3(2276.02,3586.75) ; R5.1@2182.29,3859.75 cw(c2182.29,3816.95) 2212.56,3847.21 ; R2.1@2357.02,3860.41 v1(2399.02,3860.75)
VDD: C1.2 C2.1 C4.1 ESD.5 F1.2 U2.1 U2.3 USB1.1 | length 2848
  Top Layer w12: v2(2228.02,3740.75) 2228.02,3758.08 2229.32,3764.61 2231.87,3770.76 2235.57,3776.3 2245.35,3786.08 2253.18,3791.31 2261.88,3794.91 2271.11,3796.75 2390.3,3796.75 2395.29,3797.24 2400.21,3798.22 2405.02,3799.68 2409.66,3801.6 2414.08,3803.97 2418.26,3806.76 2422.14,3809.94 2430.83,3818.63 2434.02,3822.51 2436.8,3826.69 2439.17,3831.11 2441.09,3835.75 2442.55,3840.55 2443.53,3845.48 2444.02,3850.47 v2(2444.02,3893.75)
  Top Layer w16: ESD.5@2241.02,2483.85 v1(2241.02,2525.75)
  Top Layer w18: 2018.02,2473.75 cw(c2018.02,2450.75) 2041.02,2450.75 cw(c2064.02,2450.75) 2064.02,2473.75 ; v1(2041.02,2417.75) 2041.02,2476.74
  Top Layer w24: v3(1927.02,2476.75) 1989.02,2476.75 2114.02,2476.75 F1.2@2119.02,2471.75
  Bottom Layer w12: 2061.02,3577.75 2119.37,3577.75 2124.36,3578.24 2129.29,3579.22 2134.09,3580.68 2138.73,3582.6 2143.16,3584.97 2147.33,3587.76 2151.21,3590.94 2214.02,3653.75 2224.38,3664.11 2228.02,3672.9 2228.02,3735.75 v2(2228.02,3740.75) ; USB1.1@2264.22,4015.05 2264.22,3972.61 2265.32,3967.06 2267.48,3961.84 2270.62,3957.15 2274.62,3953.15 2279.32,3950.01 2284.53,3947.85 2290.07,3946.75 2372.37,3946.75 2377.36,3946.26 2382.29,3945.28 2387.09,3943.82 2391.73,3941.9 2396.16,3939.53 2400.33,3936.74 2404.21,3933.56 v2(2444.02,3893.75)
  Bottom Layer w16: C2.1@1960.02,3022.45 1960.02,3559.26 1963.4,3567.45 1969.64,3573.74 1977.81,3577.17 2061.02,3577.75 ; v1(2041.02,2417.75) 2110.98,2417.75 2116.88,2418.33 2122.7,2419.49 2128.38,2421.21 2133.86,2423.48 2139.09,2426.28 2144.02,2429.57 2148.61,2433.34 v1(2241.02,2525.75)
  Bottom Layer w18: v3(1927.02,2476.75) 1890.81,2512.96 1886.75,2517.9 1883.2,2523.21 1880.19,2528.85 1877.75,2534.75 1875.89,2540.86 1874.65,2547.13 1874.02,2553.49 1874.02,2916.01 1874.65,2922.37 1875.89,2928.64 1877.75,2934.75 1880.19,2940.65 1883.2,2946.29 1886.75,2951.6 1890.81,2956.54 1956.72,3022.45 1973.02,3022.45 2066.92,3022.75 ; 1945.17,3010.9 cw(c1973.05,2983.03) C2.1@1973.05,3022.45
pads on no net: GPIB.GUIDE@L GPIB.GUIDE@R J1. U1.10 U1.21 U1.25 U1.27 U1.28 USB1. USB.

## Polygon pours and split planes (outlines as drawn)
GND on Bottom Layer (solid): 1841.02,4249.75 1841.02,1979.75 1839.02,1977.75 3156.02,1977.75 3156.02,4246.75
GND on Top Layer (solid): 1841.02,4249.75 1841.02,1979.75 1839.02,1977.75 3156.02,1977.75 3176.02,4246.75

## Other copper
Top Layer:
  drawing of 67 lines, arcs and shapes, not listed
  text "open source" at 2966.02,3796.75 h60 r90
  text "hardware" at 3021.02,3796.75 h60 r90
  text "MeterCare Lite" at 3033.02,2770.75 h140 r90
Bottom Layer:
  drawing of 65 lines, arcs and shapes, not listed

## Silkscreen, mask and mechanical layers (free items; w line width, h text height)
Bottom Overlay:
  text "RXD" at 2026.02,3666.75 h45 r270
  text "TXD" at 2226.02,3666.75 h45 r270
  text "POWER" at 2286.02,3626.75 h45 r270
  text "2021-10-25" at 3066.02,2531.75 h45 r90
  text "MeterCare Lite V1.21" at 2991.02,2526.75 h45 r90
Top Solder:
  text "open source" at 2966.02,3796.75 h60 r90
  text "hardware" at 3021.02,3796.75 h60 r90
  text "MeterCare Lite" at 3033.02,2770.75 h140 r90

## Text inside footprints (layer, text, board x,y; h text height)
GPIB: Document "FUY57109" at 3098.02,3281.25 h80 r270; Bottom Overlay "12" at 2678.02,2592.75 h80 r90; Bottom Overlay "1" at 2678.02,3672.75 h80 r90; Bottom Overlay "24" at 2848.02,2592.75 h80 r90; Bottom Overlay "13" at 2848.02,3712.75 h80 r91